# EAGLE board Tremendous Wolt-Gaaris (EAGLE 9.7.0)

Size 92.01 x 70.98 mm. Coordinates in mm from the lower left corner, seen from the top.
Outline: 0,0 92.01,0 92.01,70.98 0,70.98 0,0
Copper layers (1*16): Top 0.035mm / dielectric 1.5mm / Bottom 0.035mm
Design rules "default": minimum track width 6mil, minimum drill 0.35mm, track to track 6mil, track to pad 6mil, pad to pad 6mil, via to via 6mil, smd to smd 6mil, copper to edge 40mil, drill to drill 6mil, minimum pad ring 10mil, minimum via ring 8mil, stop-mask expansion 4mil, vias tented up to drill 0mil, thermal gap 10mil

## Footprints (pad centres in the part's own frame; a part is rotated, then mirrored left to right if it is on the bottom)
BATTERY-GENERIC = drill 1.118 pad 3.15 octagon: + 2.54,0; - -2.54,0
CAP-THRU-2.54MM = drill 1.016 pad 1.88: 1 -1.27,0; 2 1.27,0
RESAD1016W63L850D250B = drill 0.83 pad 1.43: 1 -5.08,0; 2 5.08,0
HA-06-SM065 = drill 1 pad 1.676: 1 -2.54,-2.54; 2 0,2.54; 3 2.54,-2.54
DIP826W53P254L1930H508Q14B = drill 0.786 pad 1.386: 1 -4.13,7.62; 2 -4.13,5.08; 3 -4.13,2.54; 4 -4.13,0; 5 -4.13,-2.54; 6 -4.13,-5.08; 7 -4.13,-7.62; 8 4.13,-7.62; 9 4.13,-5.08; 10 4.13,-2.54; 11 4.13,0; 12 4.13,2.54; 13 4.13,5.08; 14 4.13,7.62

## Placement (x,y rotation side)
BAT1  9V  [BATTERY-GENERIC]  8.26,8.26 270 top
C1  100n  [CAP-THRU-2.54MM]  86.3,58.85 0 top
C2  10n  [CAP-THRU-2.54MM]  25.34,41.08 0 top
R2  1k  [RESAD1016W63L850D250B]  41.85,41.08 180 top
RPOT1  470k  [HA-06-SM065]  24.07,63.94 0 top
RPOT2  470k  [HA-06-SM065]  82.49,63.94 0 top
U1  NA556_DIP  [DIP826W53P254L1930H508Q14B]  52.01,49.97 90 top

## Library data of the parts
BAT1 C1 C2 R2 RPOT1 RPOT2 = Tinkercad
U1 = Tinkercad; CATEGORY: IC_Clock-Timing; CURRENT-SUPPLY: 20mA; DESCRIPTION: IC OSC TIMER DUAL 14-DIP; MANUFACTURER: Texas Instruments; MPN: NA556N; OPERATING_TEMP: -40°C to 105°C; PART_STATUS: Active; ROHS_COMPLIANT: ROHS3 Compliant; SUB-CATEGORY: Dual Timer

## Nets
BAT1+: BAT1.+ RPOT1.1 RPOT1.2 RPOT2.1 RPOT2.2 U1.4 U1.10 U1.14
BAT1-: BAT1.- C1.2 C2.1 U1.7
U1_DIS1: R2.2 RPOT1.3 U1.1
U1_DIS2: C1.1 RPOT2.3 U1.12 U1.13
U1_THR1: C2.2 R2.1 U1.2 U1.6
U1_TR2: U1.5 U1.8

## Tracks (layer width: path | path; a pad name or v marks a point on that pad's centre or on a via)
BAT1+  (7 unrouted)
BAT1-  (3 unrouted)
U1_DIS1  (2 unrouted)
U1_DIS2  (3 unrouted)
U1_THR1  (3 unrouted)
U1_TR2  (1 unrouted)